# Altium PCB PCB1.PcbDoc (part 2 of 2)
Units mil, origin at the board's own origin, x right, y up, seen from the top; angles counter-clockwise.
Board outline 1515 x 2470 mil, 4 copper layers (Top Layer, GND, VCC, Bottom Layer), stack 23.756 mil thick; 65 components, 50 nets, 226 pads, 151 vias.
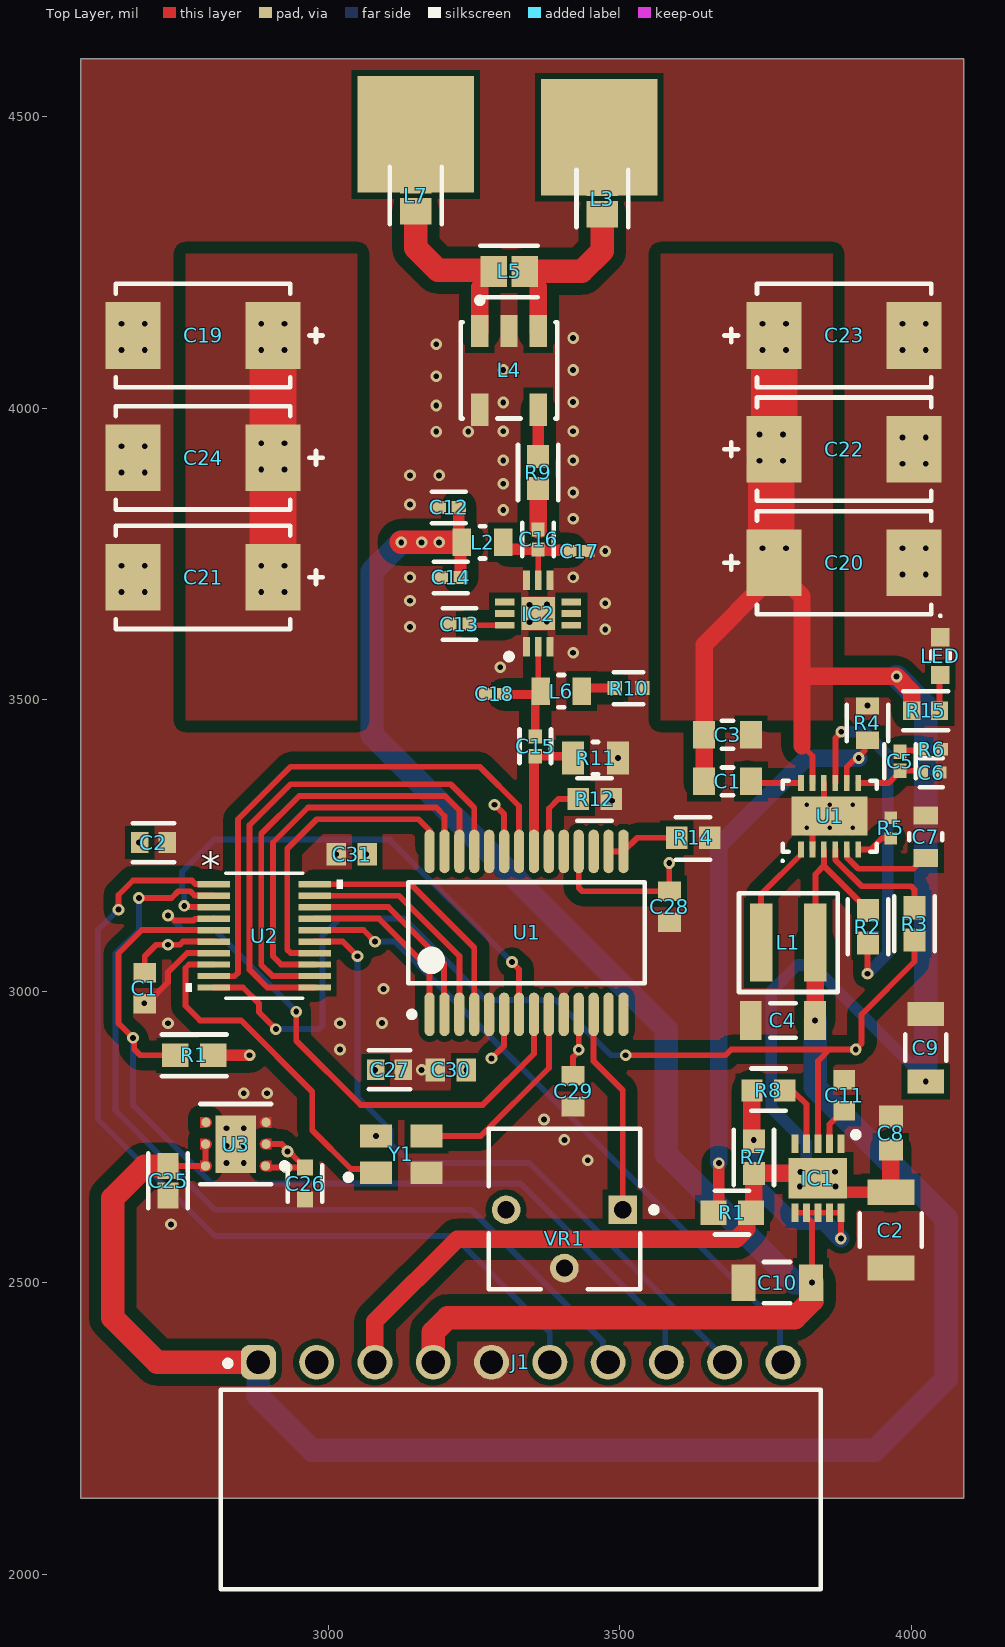
[diagram p0: Top Layer view]

## Via types
v1: diameter 20, hole 10, Top Layer to Bottom Layer, tented both sides, 145 vias
v2: diameter 19.68, hole 7.87, Top Layer to Bottom Layer, 6 vias

## Nets (pads, with @x,y where several pads share a name; then routed paths per layer and width w, separated by ;. In a path a pad name is that pad's centre, name@x,y a point inside that pad or via, vN(x,y) a via of type N, cw(c..) or ccw(c..) an arc to the next point about the centre after c; other vN are vias at no path point) (continued)
RST: (continued)
  Bottom Layer w10: v1(2665,2920) 2665,2805 2800,2670 3330,2670 3578.09,2421.91 3578.09,2386.53 3592.6,2372.02 J1.8@3601.48,2372.02
RXD: J1.6 U2.1 | length 1553.7
  Top Layer w10: v1(2640,3140) 2640,3165 2665,3190 2765.89,3190 2771.81,3184.08 2803,3184.08 U2.1
  Bottom Layer w10: v1(2640,3140) 2605,3105 2605,2780 2805,2580 3215,2580 3380,2415 J1.6
SWCLK: J1.10 U2.16 | length 1140.7
  Top Layer w10: U2.16 3060.16,3104.84 v1(3080,3085)
  Bottom Layer w10: v1(3080,3085) 3115,3085 3535.39,2664.61 3535.82,2664.61 3544.61,2655.82 3544.61,2655.39 3775,2425 J1.10@3775,2364.65
SWDIO: J1.9 U2.15 | length 1164.1
  Top Layer w10: U2.15 3024.84,3085.16 v1(3050,3060)
  Bottom Layer w10: v1(3050,3060) 3050,2818.54 3106.69,2761.85 3106.69,2738.31 3140,2705 3345,2705 J1.9@3686.49,2363.51
TXD: J1.7 U2.2 | length 1557.2
  Top Layer w10: v1(2675,3160) 2731.03,3160 2742.5,3171.47 2763.21,3171.47 2770.28,3164.4 2803,3164.4 U2.2
  Bottom Layer w10: v1(2675,3160) 2675,3105 2635,3065 2635,2795 2805,2625 3245,2625 3471.48,2398.52 3471.48,2372.02 J1.7
VBAT: C4.2 C25.1 J1.1 L1.1 R2.1 U1.3@3850.16,3243.23 U3.5 U3.6 | length 3148.7
  Top Layer w10: C25.1 2725,2700.2 U3.6 U3.5 ; L1.1 3835.79,3200.79 3850.16,3215.16 ; U1.3@3850.16,3243.23 3850.16,3215.16 ; R2.1 3911.92,3152.09 3911.92,3153.39 3850.16,3215.16
  Top Layer w30: v1(3835.12,2950) L1.1@3835.12,3082.56
  Top Layer w40: C25.1 2685,2700 2630,2645 2630,2440 2706.49,2363.51 J1.1
  Bottom Layer w40: J1.1 2880,2305 2972.5,2212.5 3937.5,2212.5 4060,2335 4060,2610 3835.12,2834.88 v1(3835.12,2950)
VCC: C7.1 U1.5@3889.53,3243.23 | length 165.5
  Top Layer w10: U1.5@3889.53,3243.23 3889.61,3243.15 3889.61,3229.99 3909.36,3210.23 4003.47,3210.23 4009.33,3216.09 4009.33,3217.83 4020.08,3228.58 C7.1
pads on no net: IC1.5 IC2.4 IC2.5 IC2.6 IC2.10 IC2.11 U1.13@3480.75,2960.24 U1.14 U1.17 U3.4 VR1.3

## Polygon pours and split planes (outlines as drawn)
3V3 on VCC "3V3_L03_P000" (solid, pour order 0): 2575,3345 2575,2130 4090,2130 4090,3345
12V on VCC "12V_L03_P006" (solid, pour order 6): 2575,4600 2575,3405 4090,3405 4090,4600
GND on Top Layer "GND_L01_P007" (solid, pour order 7): 2575,4600 4090,4600 4090,2130 2575,2130
12V on Top Layer "12V_L01_P004" (solid, pour order 4): 3570,4265 3865,4265 3865,3465 3570,3465
12V on Top Layer "12V_L01_P003" (solid, pour order 3): 2755,4265 3050,4265 3050,3465 2755,3465
GND on GND "GND_L02_P008" (solid, pour order 8): 2575,4600 4090,4600 4090,2130 2575,2130
12V_PA on GND "12V_PA_L02_P001" (solid, pour order 1): 2575,4600 2575,3405 4090,3405 4090,4600
GND on Bottom Layer "GND_L04_P005" (solid, pour order 5): 2575,4600 4090,4600 4090,2130 2575,2130

## Silkscreen, mask and mechanical layers (free items; w line width, h text height)
Mechanical 1:
  the board outline again, w0

## Text inside footprints (layer, text, board x,y; h text height)
U2: Top 3D Body "*" at 2831.5,3144.5 h50; Top Overlay "*" at 2781,3189.58 h50